# EAGLE board dummy (EAGLE 9.1.1)
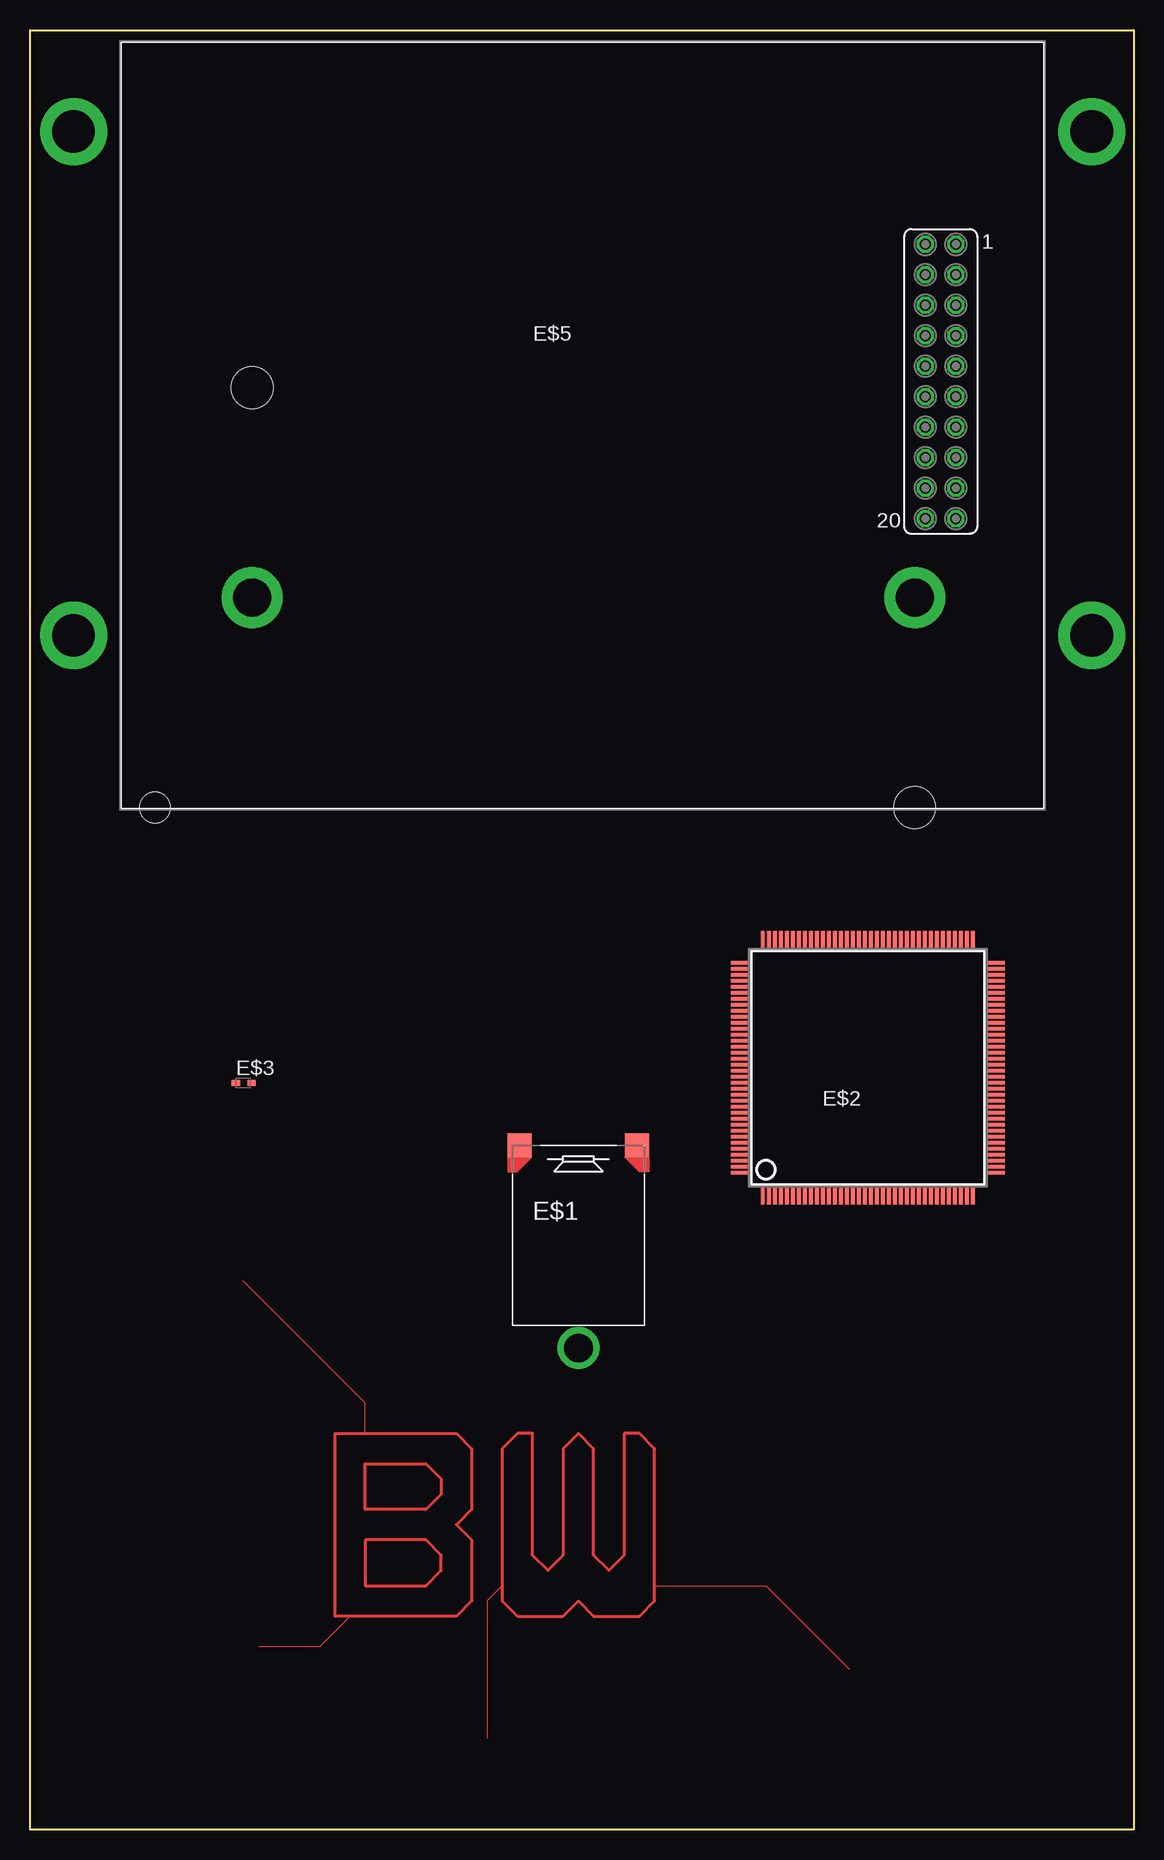
[diagram p0: board, top side]
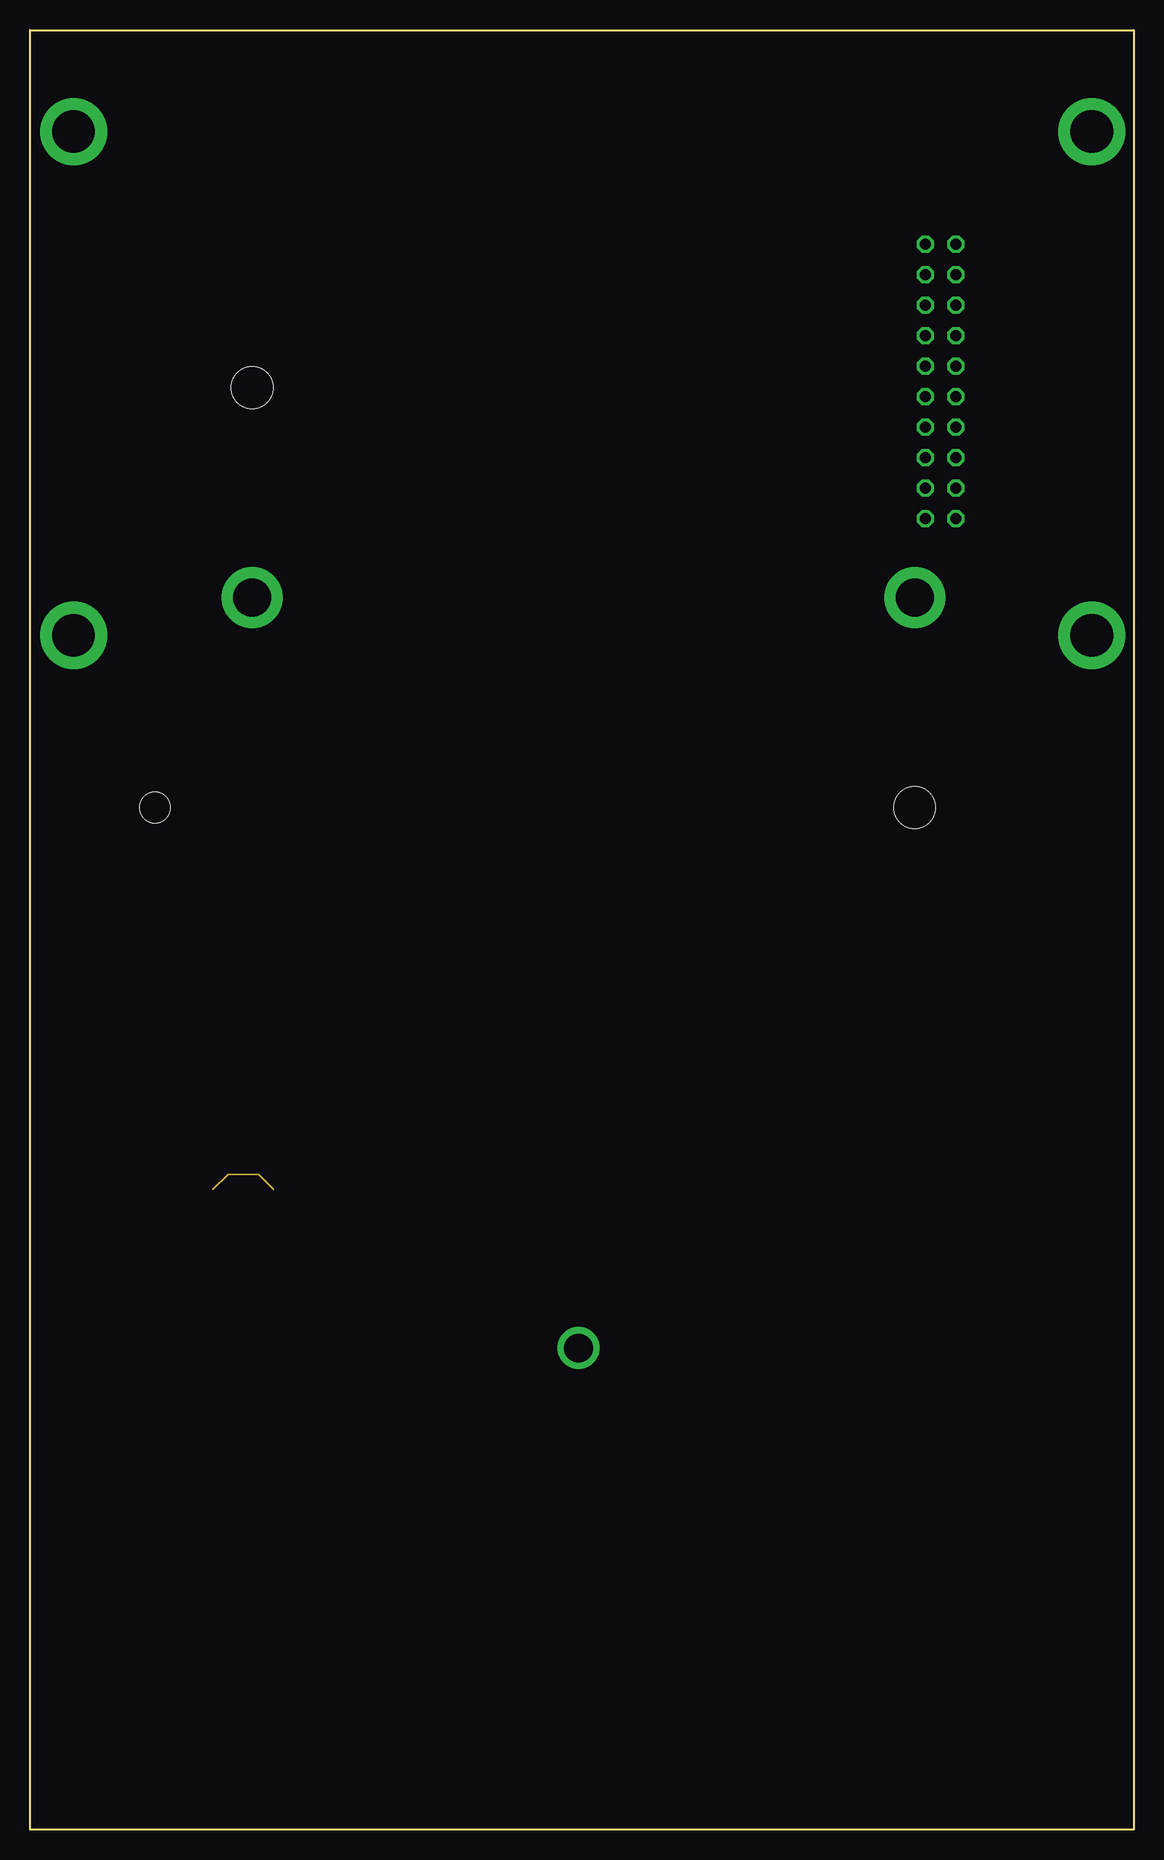
[diagram p1: board, inner layer Route2]
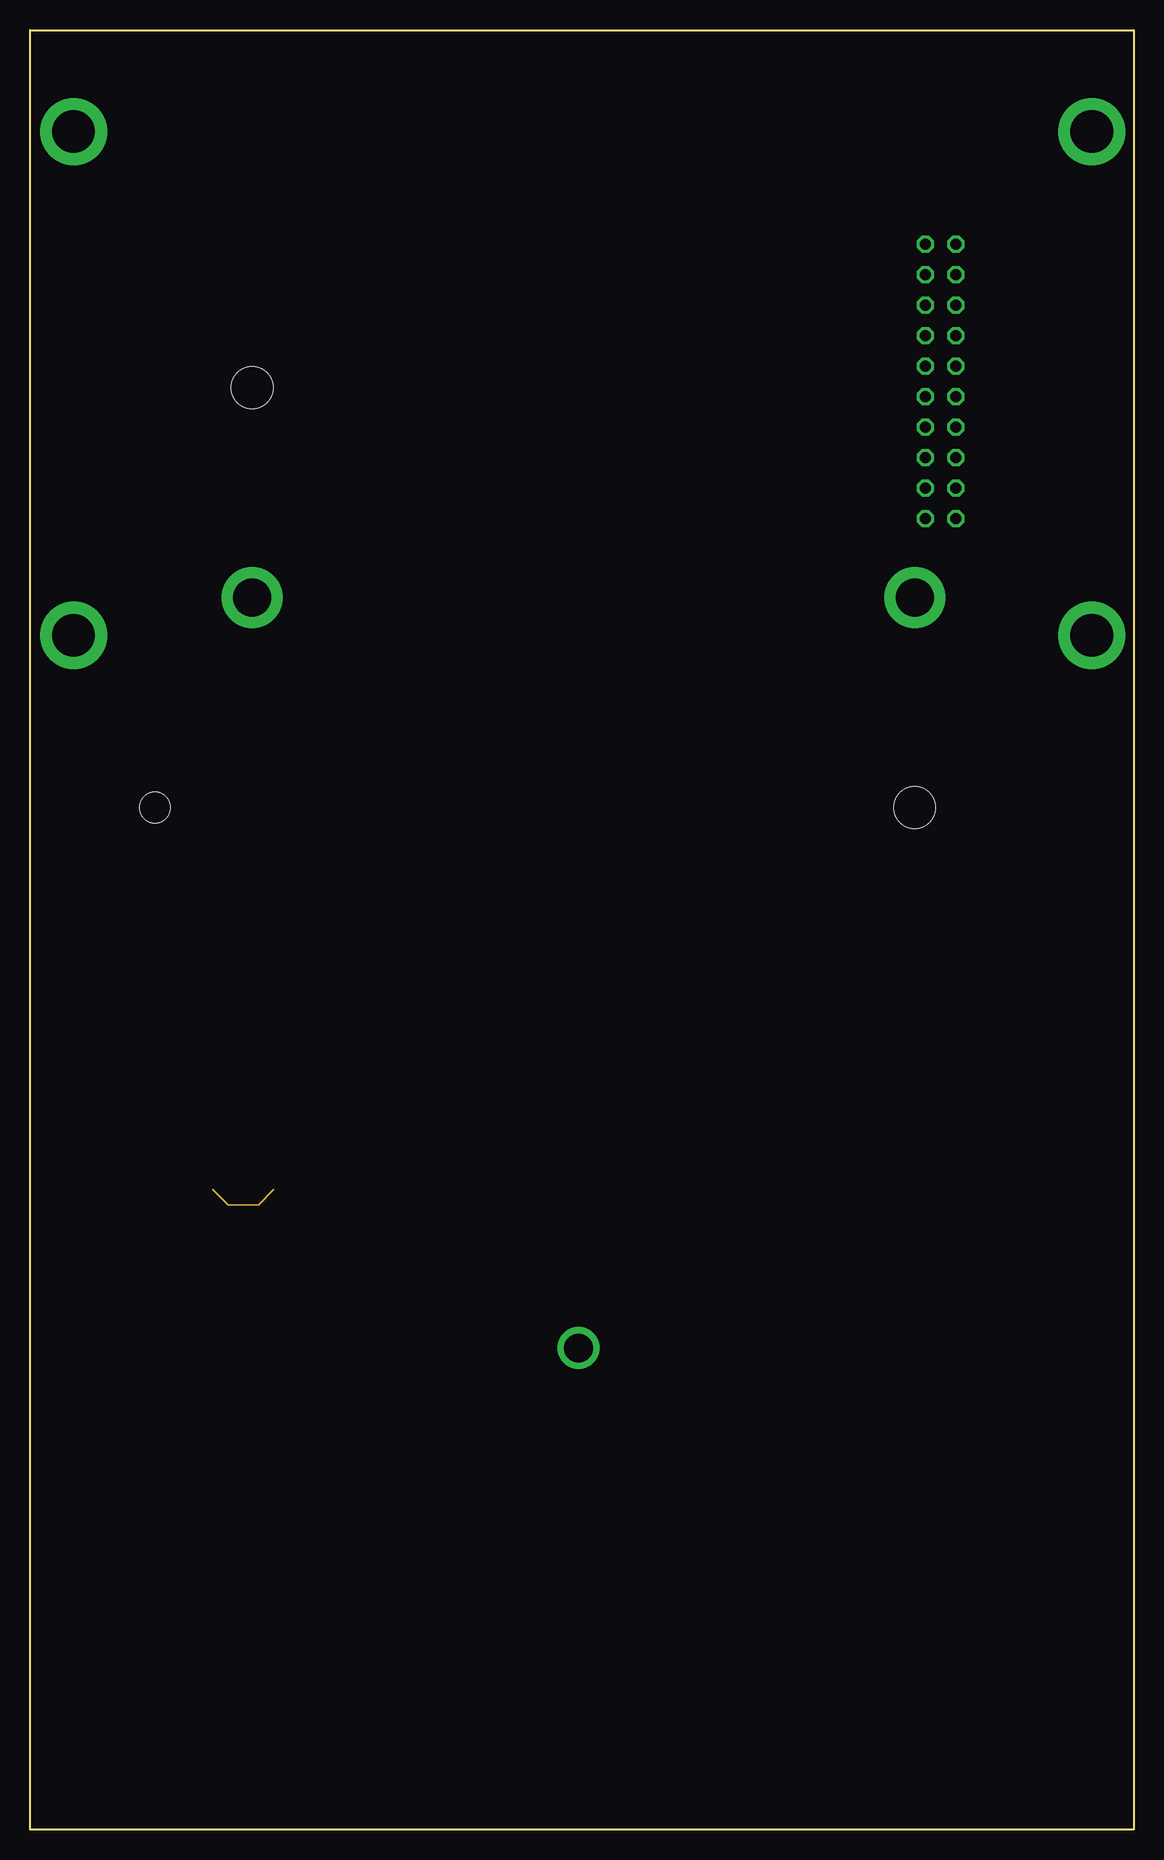
[diagram p2: board, inner layer Route15]
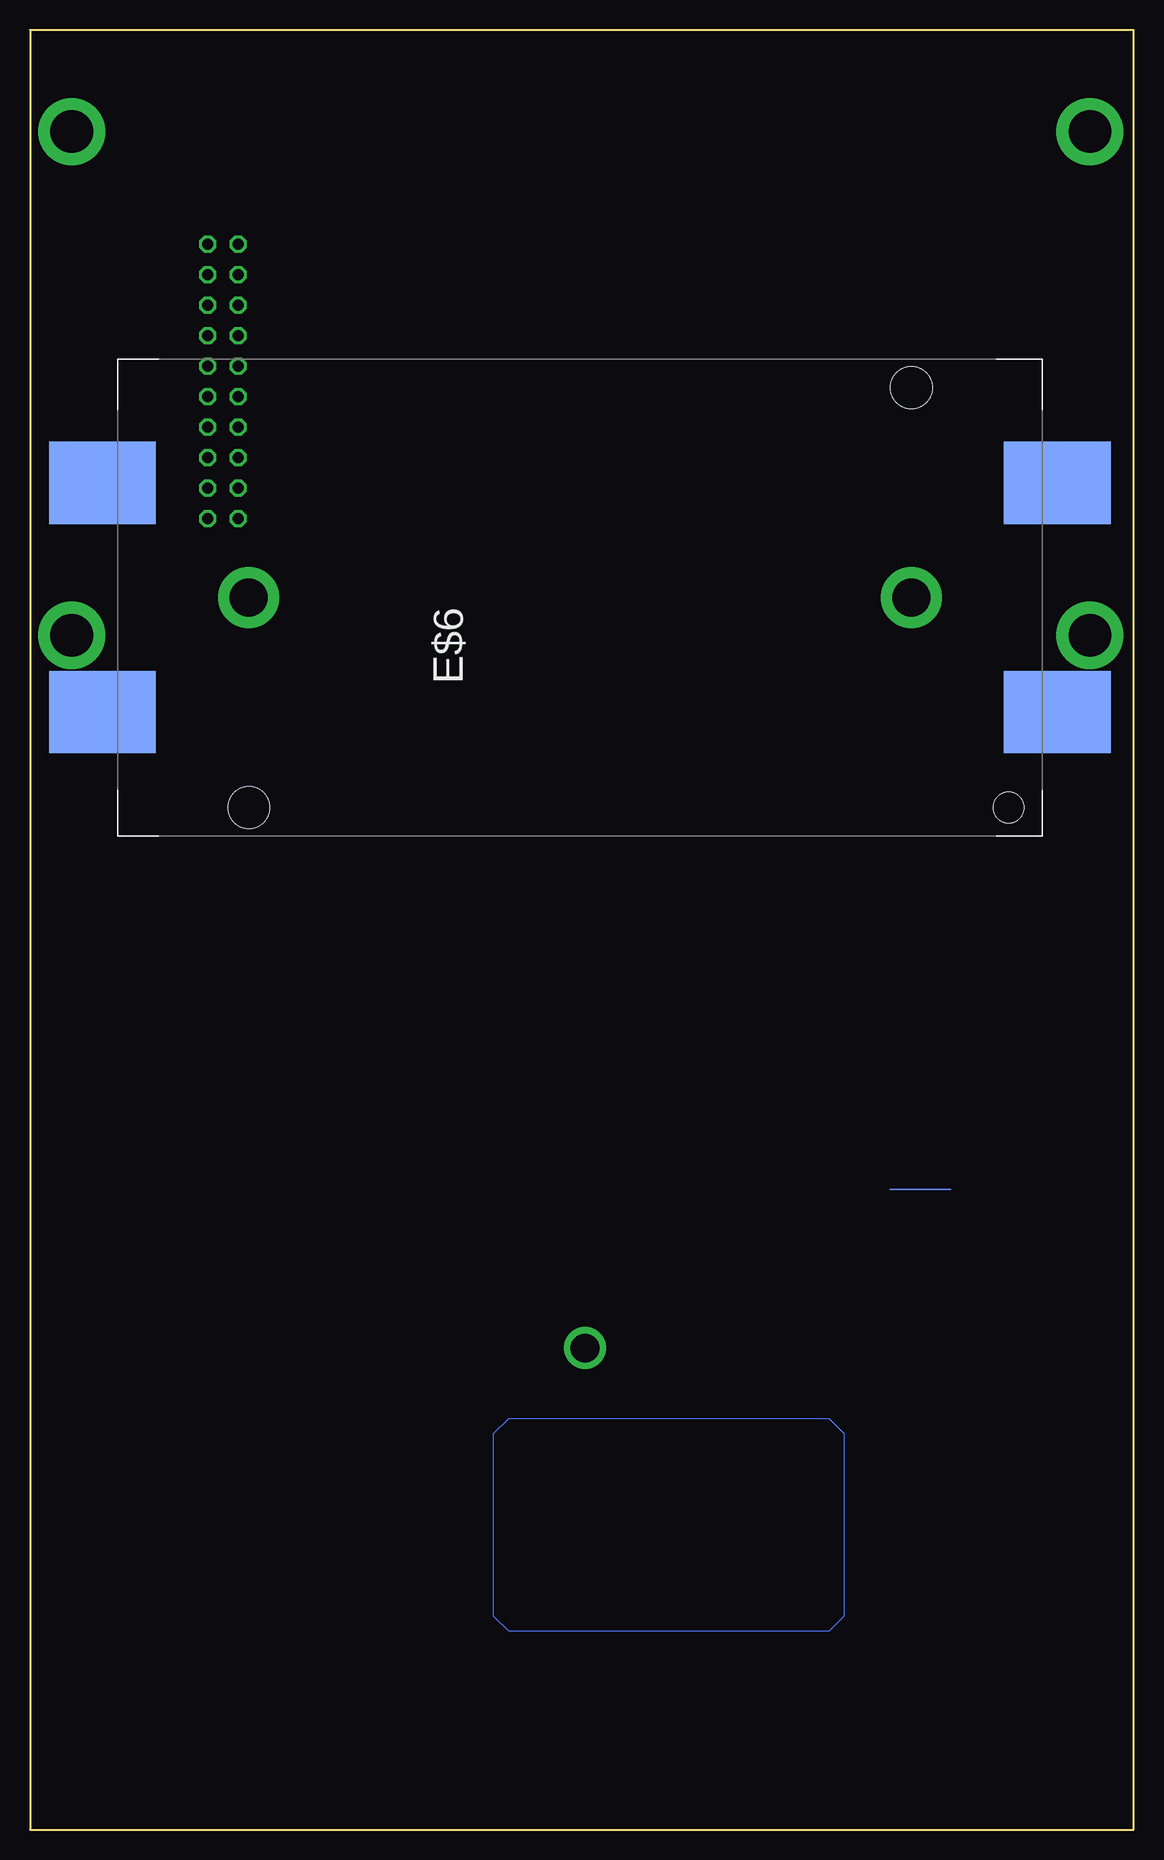
[diagram p3: board, bottom side, seen from below]

Size 92 x 150 mm. Coordinates in mm from the lower left corner, seen from the top.
Outline: 0,0 0,150 92,150 92,0 0,0
Copper layers (1*16): Top 0.035mm / dielectric 1.5mm / Bottom 0.035mm
Design rules "default": minimum track width 6mil, minimum drill 0.35mm, track to track 6mil, track to pad 6mil, pad to pad 6mil, via to via 6mil, smd to smd 6mil, copper to edge 40mil, drill to drill 6mil, minimum pad ring 10mil, minimum via ring 8mil, stop-mask expansion 4mil, vias tented up to drill 0mil, thermal gap 10mil

## Footprints (pad centres in the part's own frame; a part is rotated, then mirrored left to right if it is on the bottom)
CMS-151135-078S = smd 2 x 2: + -4.9,7.5; - 4.9,7.5 | drill 2.4 pad 3.5: S 0,-9.398
SQFP-S-20X20-144 = smd 0.3 x 1.6: 1 -8.75,-10.6; 2 -8.25,-10.6; 3 -7.75,-10.6; 4 -7.25,-10.6; 5 -6.75,-10.6; 6 -6.25,-10.6; 7 -5.75,-10.6; 8 -5.25,-10.6; 9 -4.75,-10.6; 10 -4.25,-10.6; 11 -3.75,-10.6; 12 -3.25,-10.6; 13 -2.75,-10.6; 14 -2.25,-10.6; 15 -1.75,-10.6; 16 -1.25,-10.6; 17 -0.75,-10.6; 18 -0.25,-10.6; 19 0.25,-10.6; 20 0.75,-10.6; 21 1.25,-10.6; 22 1.75,-10.6; 23 2.25,-10.6; 24 2.75,-10.6; 25 3.25,-10.6; 26 3.75,-10.6; 27 4.25,-10.6; 28 4.75,-10.6; 29 5.25,-10.6; 30 5.75,-10.6; 31 6.25,-10.6; 32 6.75,-10.6; 33 7.25,-10.6; 34 7.75,-10.6; 35 8.25,-10.6; 36 8.75,-10.6; 73 8.75,10.6; 74 8.25,10.6; 75 7.75,10.6; 76 7.25,10.6; 77 6.75,10.6; 78 6.25,10.6; 79 5.75,10.6; 80 5.25,10.6; 81 4.75,10.6; 82 4.25,10.6; 83 3.75,10.6; 84 3.25,10.6; 85 2.75,10.6; 86 2.25,10.6; 87 1.75,10.6; 88 1.25,10.6; 89 0.75,10.6; 90 0.25,10.6; 91 -0.25,10.6; 92 -0.75,10.6; 93 -1.25,10.6; 94 -1.75,10.6; 95 -2.25,10.6; 96 -2.75,10.6; 97 -3.25,10.6; 98 -3.75,10.6; 99 -4.25,10.6; 100 -4.75,10.6; 101 -5.25,10.6; 102 -5.75,10.6; 103 -6.25,10.6; 104 -6.75,10.6; 105 -7.25,10.6; 106 -7.75,10.6; 107 -8.25,10.6; 108 -8.75,10.6 | smd 1.6 x 0.3: 37 10.6,-8.75; 38 10.6,-8.25; 39 10.6,-7.75; 40 10.6,-7.25; 41 10.6,-6.75; 42 10.6,-6.25; 43 10.6,-5.75; 44 10.6,-5.25; 45 10.6,-4.75; 46 10.6,-4.25; 47 10.6,-3.75; 48 10.6,-3.25; 49 10.6,-2.75; 50 10.6,-2.25; 51 10.6,-1.75; 52 10.6,-1.25; 53 10.6,-0.75; 54 10.6,-0.25; 55 10.6,0.25; 56 10.6,0.75; 57 10.6,1.25; 58 10.6,1.75; 59 10.6,2.25; 60 10.6,2.75; 61 10.6,3.25; 62 10.6,3.75; 63 10.6,4.25; 64 10.6,4.75; 65 10.6,5.25; 66 10.6,5.75; 67 10.6,6.25; 68 10.6,6.75; 69 10.6,7.25; 70 10.6,7.75; 71 10.6,8.25; 72 10.6,8.75; 109 -10.6,8.75; 110 -10.6,8.25; 111 -10.6,7.75; 112 -10.6,7.25; 113 -10.6,6.75; 114 -10.6,6.25; 115 -10.6,5.75; 116 -10.6,5.25; 117 -10.6,4.75; 118 -10.6,4.25; 119 -10.6,3.75; 120 -10.6,3.25; 121 -10.6,2.75; 122 -10.6,2.25; 123 -10.6,1.75; 124 -10.6,1.25; 125 -10.6,0.75; 126 -10.6,0.25; 127 -10.6,-0.25; 128 -10.6,-0.75; 129 -10.6,-1.25; 130 -10.6,-1.75; 131 -10.6,-2.25; 132 -10.6,-2.75; 133 -10.6,-3.25; 134 -10.6,-3.75; 135 -10.6,-4.25; 136 -10.6,-4.75; 137 -10.6,-5.25; 138 -10.6,-5.75; 139 -10.6,-6.25; 140 -10.6,-6.75; 141 -10.6,-7.25; 142 -10.6,-7.75; 143 -10.6,-8.25; 144 -10.6,-8.75
SOD523 = smd 0.7 x 0.5: A 0.7,0; C -0.6,0
DISPLAYCONN = drill 0.914 octagon: 1 69.571,47.041; 2 67.031,47.041; 3 69.571,44.501; 4 67.031,44.501; 5 69.571,41.961; 6 67.031,41.961; 7 69.571,39.421; 8 67.031,39.421; 9 69.571,36.881; 10 67.031,36.881; 11 69.571,34.341; 12 67.031,34.341; 13 69.571,31.801; 14 67.031,31.801; 15 69.571,29.261; 16 67.031,29.261; 17 69.571,26.721; 18 67.031,26.721; 19 69.571,24.181; 20 67.031,24.181 | drill 3.556 pad 5.588: S1 -3.988,14.453; S2 -3.988,56.439; S3 80.899,56.439; S4 80.899,14.453
KEYSTONE-1048 = smd 6.858 x 8.89: 1 10.338,-1.27; 2 29.439,-1.27; 3 10.338,78.334; 4 29.439,78.334 | drill 3.175 pad 5.08: S1 19.888,10.897; S2 19.888,66.142 | hole 3.454: 2.388,66.142; 37.389,10.897 | hole 2.54: 2.388,2.794

## Placement (x,y rotation side)
E$1  [CMS-151135-078S]  45.72,49.53 0 top
E$2  [SQFP-S-20X20-144]  69.85,63.5 0 top
E$3  [SOD523]  17.78,62.23 0 top
E$5  [DISPLAYCONN]  7.62,85.09 0 top
E$6  [KEYSTONE-1048]  7.62,82.8 90 bottom

## Library data of the parts
E$1 E$5 E$6 = ExtraParts
E$2 = ref-packages
E$3 = diode

## Tracks (layer width: path | path; a pad name or v marks a point on that pad's centre or on a via)
S$1
  Route2 0.12: 15.24,53.34 16.51,54.61 19.05,54.61 20.32,53.34
  Route15 0.12: 20.32,53.34 19.05,52.07 16.51,52.07 15.24,53.34
  Bottom 0.12: 15.24,53.34 20.32,53.34
S$2
  Top 0.102: 27.94,33.02 27.94,35.56 24.13,39.37 17.78,45.72 | 26.67,17.78 24.13,15.24 19.05,15.24
  Top 0.254: 25.4,33.02 25.4,17.78 26.67,17.78 35.56,17.78 36.83,19.05 36.83,24.13 35.56,25.4 36.83,26.67 36.83,31.75 35.56,33.02 27.94,33.02 25.4,33.02
S$3
  Top 0.102: 52.07,20.32 61.34,20.32 63.88,17.78 68.33,13.34 | 39.37,20.32 38.1,19.05 38.1,12.7 38.1,7.62
  Top 0.254: 39.37,31.75 39.37,20.32 39.37,19.05 40.64,17.78 44.45,17.78 45.72,19.05 46.99,17.78 50.8,17.78 52.07,19.05 52.07,20.32 52.07,31.75 50.8,33.02 49.53,33.02 49.53,22.86 48.26,21.59 46.99,22.86 46.99,31.75 45.72,33.02 44.45,31.75 44.45,22.86 43.18,21.59 41.91,22.86 41.91,33.02 40.64,33.02 39.37,31.75
S$4
  Top 0.254: 27.94,20.32 33.02,20.32 34.29,21.59 34.29,22.86 33.02,24.13 27.94,24.13 27.94,20.32
S$5
  Top 0.254: 27.94,30.48 33.02,30.48 34.29,29.21 34.29,27.94 33.02,26.67 27.94,26.67 27.94,30.48
S$6
  Bottom 0.102: 25.4,16.51 52.07,16.51 53.34,17.78 53.34,33.02 52.07,34.29 25.4,34.29 24.13,33.02 24.13,17.78 25.4,16.51